# Altium PCB capacitivesensor.PcbDoc
Units mil, origin at the board's own origin, x right, y up, seen from the top; angles counter-clockwise.
Board outline 2362.2 x 952.76 mil, 2 copper layers (Top, Bottom); 50 components, 36 nets, 110 pads, 66 vias.
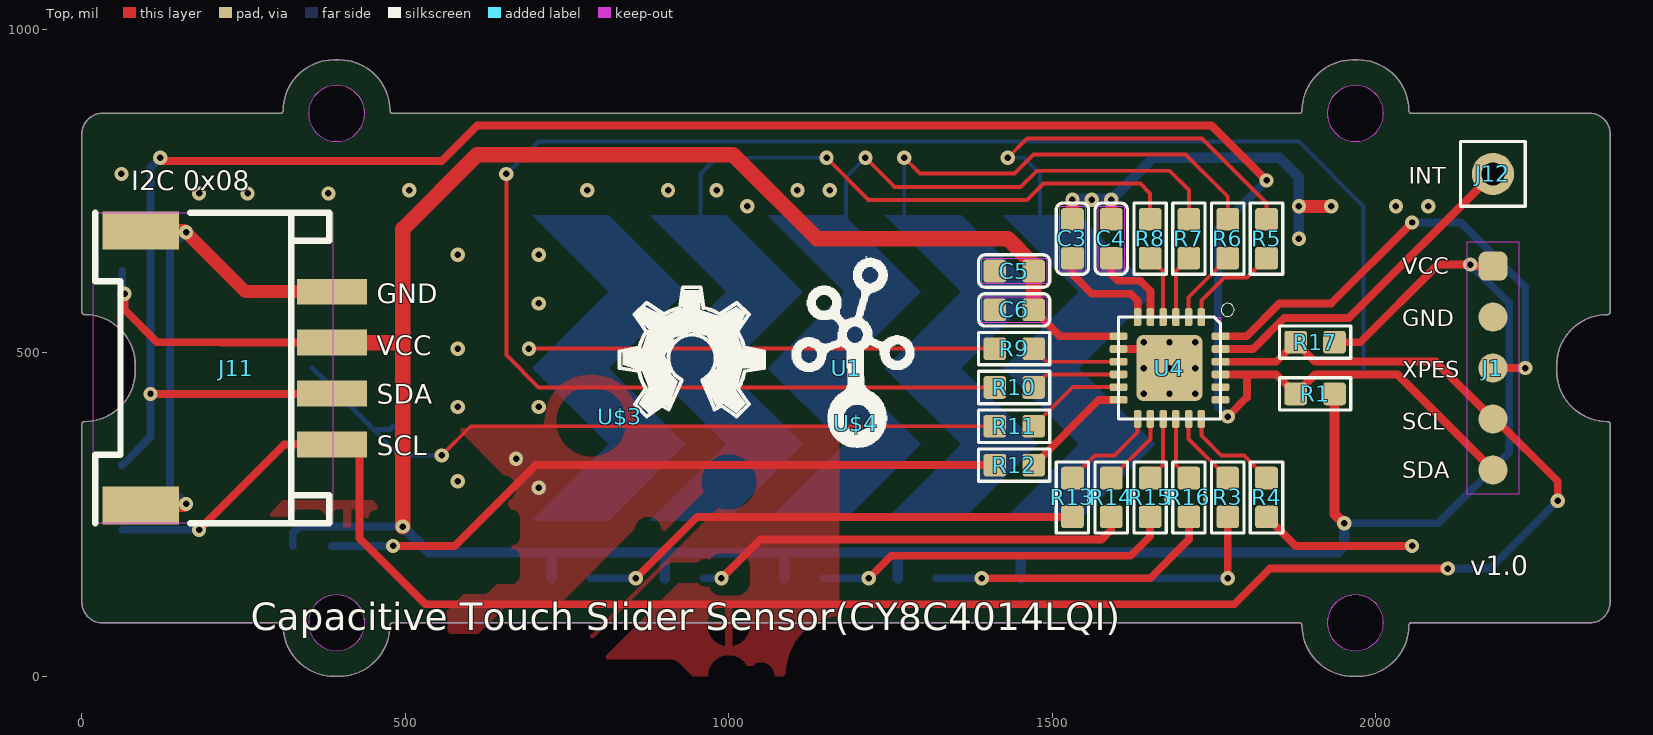
[diagram p0: Top view]
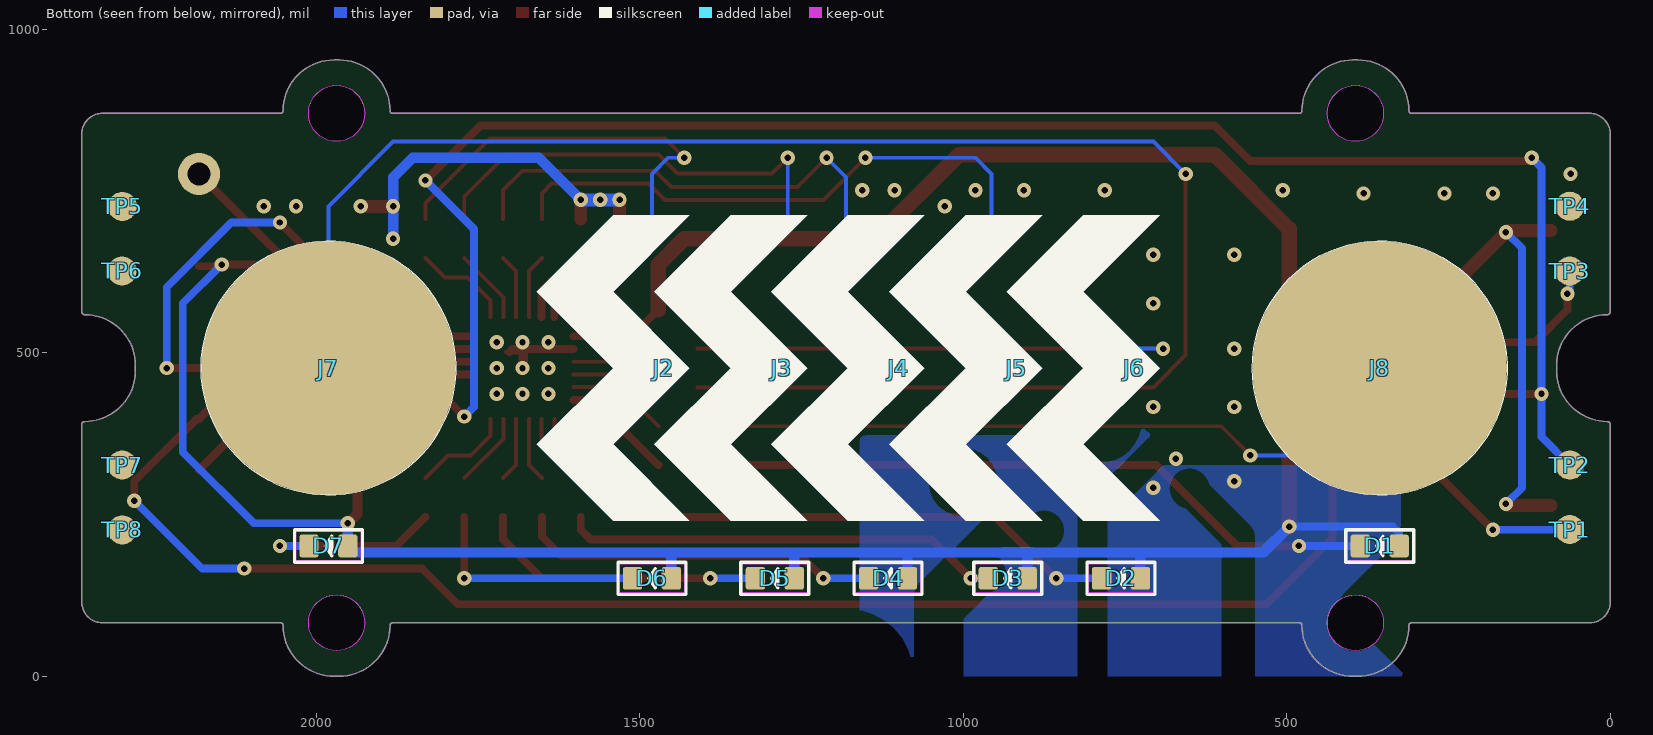
[diagram p1: Bottom view, seen from below]

## Layer stack, top to bottom
Top Solder: solder mask 0.4, Solder Resist, Dk 3.5
Top: signal copper 1.378
Dielectric 1: dielectric 12.6, FR-4, Dk 4.8
Bottom: signal copper 1.378
Bottom Solder: solder mask 0.4, Solder Resist, Dk 3.5

## Board outline
2362.2,562.99 cw(c2358.27,562.99) 2358.27,559.06 ccw(c2358.27,480.32) 2279.53,480.32 2279.53,472.44 ccw(c2358.27,472.44) 2358.27,393.7 cw(c2358.27,389.77) 2362.2,389.77 2362.2,114.18 cw(c2330.7,114.17) 2330.71,82.68 2055.12,82.68 ccw(c2055.12,78.74) 2051.18,78.74 cw(c1972.44,78.74) 1972.44,0 1964.56,0 cw(c1964.56,78.74) 1885.82,78.74 ccw(c1881.88,78.75) 1881.89,82.68 1267.71,82.68 480.31,82.68 ccw(c480.31,78.75) 476.38,78.74 cw(c397.64,78.74) 397.64,0 389.76,0 cw(c389.76,78.74) 311.02,78.74 ccw(c307.08,78.74) 307.08,82.68 31.49,82.68 cw(c31.5,114.17) 0,114.18 0,389.77 cw(c3.93,389.77) 3.93,393.7 ccw(c3.93,472.44) 82.67,472.44 82.67,480.32 ccw(c3.93,480.32) 3.93,559.06 cw(c3.93,562.99) 0,562.99 0,838.58 cw(c31.5,838.59) 31.49,870.08 307.08,870.08 ccw(c307.08,874.02) 311.02,874.02 cw(c389.76,874.02) 389.76,952.76 397.64,952.76 cw(c397.64,874.02) 476.38,874.02 ccw(c480.31,874.01) 480.31,870.08 1271.1,870.08 1881.89,870.08 ccw(c1881.88,874.01) 1885.82,874.02 cw(c1964.56,874.02) 1964.56,952.76 1972.44,952.76 cw(c1972.44,874.02) 2051.18,874.02 ccw(c2055.12,874.02) 2055.12,870.08 2330.71,870.08 cw(c2330.7,838.59) 2362.2,838.58
cut-out: 393.7,39.38 ccw(c393.7,82.68) 437,82.68 ccw(c393.7,82.68) 393.7,125.98 ccw(c393.7,82.68) 350.39,82.68 ccw(c393.7,82.68)
cut-out: 393.7,826.77 ccw(c393.7,870.08) 437,870.08 ccw(c393.7,870.08) 393.7,913.38 ccw(c393.7,870.08) 350.39,870.08 ccw(c393.7,870.08)
cut-out: 1968.5,826.77 ccw(c1968.5,870.08) 2011.81,870.08 ccw(c1968.5,870.08) 1968.5,913.38 ccw(c1968.5,870.08) 1925.19,870.08 ccw(c1968.5,870.08)
cut-out: 1968.5,39.38 ccw(c1968.5,82.68) 2011.81,82.68 ccw(c1968.5,82.68) 1968.5,125.98 ccw(c1968.5,82.68) 1925.19,82.68 ccw(c1968.5,82.68)

## Design rules (kind name [scope] priority, off if disabled: settings)
BoardOutlineClearance mdCopperDimension [All] p1: gap=10 ignorepadtopadclearanceinfootprint=FALSE except(0: Arc-SplitContinuation Track-SplitContinuation SMDPad-SplitContinuation THPad-SplitContinuation Via-SplitContinuation Fill-SplitContinuation Poly-SplitContinuation Region-SplitContinuation Text-SplitContinuation)
Clearance Clearance_for_PolygonClass_Isolate_20 [InPolygonClass('Isolate_20') vs IsArc Or IsTrack Or IsPad Or IsVia Or IsFill Or IsRegion Or IsText] p1: gap=20 ignorepadtopadclearanceinfootprint=FALSE
Clearance Clearance_for_PolygonClass_Isolate_10 [InPolygonClass('Isolate_10') vs IsArc Or IsTrack Or IsPad Or IsVia Or IsFill Or IsRegion Or IsText] p2: gap=10 ignorepadtopadclearanceinfootprint=FALSE
Clearance "Clearance (Same Net)" [All] p3: gap=6 ignorepadtopadclearanceinfootprint=FALSE
Clearance Clearance_for_NetClass_power [InNetClass('power') vs InNetClass('power')] p4: gap=20 ignorepadtopadclearanceinfootprint=FALSE
Clearance [All] p5: gap=6 ignorepadtopadclearanceinfootprint=FALSE
HoleSize HoleSize_For_NetClass_power [InNetClass('power')] p1: absolutevalues=TRUE maxlimit=20 minlimit=20 maxpercent=80.000 minpercent=20.000
HoleSize [All] p2: absolutevalues=TRUE maxlimit=100000 minlimit=10 maxpercent=80.000 minpercent=20.000
HoleToHoleClearance mdDrill [All] p1: gap=10 allowstackedmicrovias=TRUE
MinimumSolderMaskSliver [All] p1 off: minsoldermaskwidth=10
PasteMaskExpansion Expansion_SMDPaste_OFF [InPadClass('SMDPaste_OFF')] p1: expansion=0
PasteMaskExpansion mlMinCreamFrame [All] p2: expansion=0
PolygonConnect PolygonConnect_For_PolygonThermal_ON_Width120000_Gap100000 [InPolygonClass('PolygonThermal_ON_Width120000_Gap100000') vs Not IsVia] p1: connectstyle=Relief reliefconductorwidth=12 reliefentries=4 polygonreliefangle="90 Angle" airgapwidth=10
PolygonConnect ThermalVias [IsVia] p2: connectstyle=Direct reliefconductorwidth=10 reliefentries=4 polygonreliefangle="90 Angle" airgapwidth=10
PolygonConnect [All] p3: connectstyle=Relief reliefconductorwidth=10 reliefentries=4 polygonreliefangle="90 Angle" airgapwidth=10
RoutingVias [All] p1: holewidth=10 width=22 viastyle="Through Hole" minholewidth=10 minwidth=22 maxholewidth=100 maxwidth=100
SolderMaskExpansion Expansion_SMDSolder_OFF [InPadClass('SMDSolder_OFF')] p1: expansion=0 istentingtop=FALSE
SolderMaskExpansion mlMinStopFrame [All] p2: expansion=2 istentingtop=FALSE
Width Width_For_NetClass_power [InNetClass('power')] p1: maxlimit=40 minlimit=10 preferedwidth=20
Width [All] p2: maxlimit=10000 minlimit=1 preferedwidth=1
26 further rules are at their usual default settings.

## Classes and differential pairs
polygon class PolygonThermal_ON_Width120000_Gap100000: Polygon_1_Net_GND Polygon_2_Net_GND
polygon class Isolate_20: Polygon_2_Net_GND
polygon class Isolate_10: Polygon_1_Net_GND
pad class SMDSolder_OFF: J2-1 J3-1 J4-1 J5-1 J6-1 J7-1 J8-1
pad class SMDPaste_OFF: J1-1 J1-2 J1-3 J1-4 J1-5 J2-1 J3-1 J4-1 J5-1 J6-1 J7-1 J8-1 TP1-T TP2-T TP3-T TP4-T TP5-T TP6-T TP7-T TP8-T

## Components (designator, comment, footprint, x,y, rotation, side; value= is the part's Value field where it differs from the comment)
C3 "100nF" C0603 1531.1,676.38 r0 top
C4 "2.2nF" C0603 1591.1,676.38 r0 top
C5 "10uF" C0603 1441.1,626.38 r270 top
C6 "100nF" C0603 1441.1,566.38 r270 top
D1 "Green" LED-0603 356.1,201.38 r180 bottom
D2 "Green" LED-0603 756.1,151.38 r180 bottom
D3 "Green" LED-0603 931.1,151.38 r180 bottom
D4 "Green" LED-0603 1116.1,151.38 r180 bottom
D5 "Green" LED-0603 1291.1,151.38 r180 bottom
D6 "Green" LED-0603 1481.1,151.38 r180 bottom
D7 "Green" LED-0603 1981.1,201.38 r180 bottom
FR1 "" SEEEDSTUDIO-PCB-FRAME -1573.9,-1518.62 r0 top
J1 "DNP" H5-SMD-2.0-TEST 2181.1,476.38 r0 top
J2 "" PAD-SLIDE-1P 1423.1,476.38 r0 bottom
J3 "" PAD-SLIDE-1P 1241.2,476.38 r0 bottom
J4 "" PAD-SLIDE-1P 1060.07,476.38 r0 bottom
J5 "" PAD-SLIDE-1P 877.85,476.38 r0 bottom
J6 "" PAD-SLIDE-1P 696.1,476.38 r0 bottom
J7 "" PAD-SWITCH-1P 1981.1,476.38 r180 bottom
J8 "" PAD-SWITCH-1P 356.1,476.38 r180 bottom
J11 "Grove" HW4-SMD-2.0-90D 382.55,476.38 r90 top
J12 "DNP" 1P-65/35MIL 2181.1,776.38 r0 top
R1 "4.7k" R0603 1906.1,436.38 r90 top
R3 "560R" R0603 1771.1,276.38 r180 top
R4 "560R" R0603 1831.1,276.38 r180 top
R5 "560R" R0603 1831.1,676.38 r0 top
R6 "560R" R0603 1771.1,676.38 r0 top
R7 "560R" R0603 1711.1,676.38 r0 top
R8 "560R" R0603 1651.1,676.38 r0 top
R9 "560R" R0603 1441.1,506.38 r90 top
R10 "560R" R0603 1441.1,446.38 r90 top
R11 "560R" R0603 1441.1,386.38 r90 top
R12 "560R" R0603 1441.1,326.38 r90 top
R13 "560R" R0603 1531.1,276.38 r180 top
R14 "560R" R0603 1591.1,276.38 r180 top
R15 "560R" R0603 1651.1,276.38 r180 top
R16 "560R" R0603 1711.1,276.38 r180 top
R17 "4.7k" R0603 1906.1,516.38 r90 top
TP1 "" TP-D45MIL 62.44,226.77 r0 bottom
TP2 "" TP-D45MIL 62.17,326.33 r0 bottom
TP3 "" TP-D45MIL 62.37,626.28 r0 bottom
TP4 "" TP-D45MIL 62.29,726.54 r0 bottom
TP5 "" TP-D45MIL 2299.63,726.31 r180 bottom
TP6 "" TP-D45MIL 2299.98,626.49 r180 bottom
TP7 "" TP-D45MIL 2299.84,326.39 r180 bottom
TP8 "" TP-D45MIL 2299.67,226.29 r180 bottom
U1 "" GROVE-1*3-DRILL-DIM 1181.1,476.38 r0 top
U4 "CY8C4014LQI-422" QFN24G-0.5-4X4MM 1681.1,476.38 r270 top
U$3 "" OSHW_FILLX200_NOTEXT 831.1,401.38 r0 top
U$4 "" TWIGLOGO 1196.1,391.38 r0 top

## Footprints (in the part's own frame and the unit in brackets; to place one, negate y for a bottom-side part, rotate by r counter-clockwise, add the part's x,y. Pads: shape width x height; smd on the part's side, far side on the other; paste and mask are expansions set on the pad)
1P-65/35MIL [mil] "1P-65/35MIL"
  round 65 / inner round 60 / far side round 65 hole 35: 1(0,0)
  Top keep-out region: -50,-50 -50,50 50,50 50,-50
  silkscreen extent -50,-50 50,50
C0603 [mil] "C0603"
  rrect25% 35x35 smd: 1(0,30) 2(0,-30)
  Top keep-out region: -20,50 20,50 20,-50 -20,-50
  silkscreen extent -25,-55 25,55
GROVE-1*3-DRILL-DIM [mil] "GROVE-1*3-DRILL-DIM"
H5-SMD-2.0-TEST [mil] "H5-SMD-2.0-TEST"
  rrect50% 45x45 smd paste-22.5: 1(0,157.48)
  rrect100% 45x45 smd paste-22.5: 2(0,78.74) 3(0,0) 4(0,-78.74) 5(0,-157.48)
  Top keep-out region: -40,-195 -40,195 40,195 40,-195
HW4-SMD-2.0-90D [mm] "HW4-SMD-2.0-90D"
  rect 1.01x2.74 smd: 1(-3,-0.1) 2(-1,-0.1) 3(1,-0.1) 4(3,-0.1)
  rect 1.5x3 smd: SS1(-5.4,7.4) SS2(5.4,7.4)
  Top keep-out region: -6.096,-0.127 -6.096,9.271 6.096,9.271 6.096,-0.127
  silkscreen extent -6.1,0 6.1,9.2
LED-0603 [mil] "LED-0603"
  rrect25% 30x35 smd: +(30,0) -(-30,0)
  Top keep-out region: 50,22.5 50,-22.5 -50,-22.5 -50,22.5
  silkscreen extent -52,-25 52,25
OSHW_FILLX200_NOTEXT [mil] "OSHW_FILLX200_NOTEXT"
  silkscreen extent 0,0 223,200
PAD-SLIDE-1P [mm] "PAD-SLIDE-1P"
  rect 1.27x0.635 smd paste-0.635 mask-0.635: 1(1,0)
  Top region: 0,6 3,6 6,3 3,0 6,-3 3,-6 0,-6 3,-3 0,0 3,3 0,6
  silkscreen extent 0,-6 6,6
PAD-SWITCH-1P [mil] "PAD-SWITCH-1P"
  rrect100% 393.7x393.7 smd paste-196.85 mask-196.85: 1(0,0)
  silkscreen extent -197,-197 197,197
QFN24G-0.5-4X4MM [mm] "QFN24G-0.5-4X4MM"
  rrect50% 0.7x0.3 smd: 1(-2,1.25) 2(-2,0.75) 3(-2,0.25) 4(-2,-0.25) 5(-2,-0.75) 6(-2,-1.25) 13(2,-1.25) 14(2,-0.75) 15(2,-0.25) 16(2,0.25) 17(2,0.75) 18(2,1.25)
  rrect50% 0.3x0.7 smd: 7(-1.25,-2) 8(-0.75,-2) 9(-0.25,-2) 10(0.25,-2) 11(0.75,-2) 12(1.25,-2) 19(1.25,2) 20(0.75,2) 21(0.25,2) 22(-0.25,2) 23(-0.75,2) 24(-1.25,2)
  rrect25% 2.6x2.6 smd: PAD(0,0)
  Top keep-out region: -2,-2 -2,2 2,2 2,-2
  silkscreen extent -2.54,-2 2,2.54
R0603 [mil] "R0603"
  rrect25% 35x35 smd: 1(0,30) 2(0,-30)
  silkscreen extent -25,-55 25,55
SEEEDSTUDIO-PCB-FRAME [mil] "SEEEDSTUDIO-PCB-FRAME"
TP-D45MIL [mil] "TP-D45MIL"
  rrect100% 45x45 smd paste-22.5: T(0,0)
TWIGLOGO [mil] "TWIGLOGO"
  silkscreen extent -98,-38 90,257

## Part data
C3 C4 C5 C6: library part C0603, PackageName=C0603, OriginalSource=Eagle
D1 D2 D3 D4 D5 D6 D7: library part LED-0603, PackageName=LED-0603, OriginalSource=Eagle
FR1: library part SEEEDSTUDIO-PCB-FRAME, PackageName=SEEEDSTUDIO-PCB-FRAME, OriginalSource=Eagle
J1: library part H5-SMD-2.0-TEST, PackageName=H5-SMD-2.0-TEST, OriginalSource=Eagle
J2 J3 J4 J5 J6: library part PAD-SLIDE-1P, PackageName=PAD-SLIDE-1P, OriginalSource=Eagle
J7 J8: library part PAD-SWITCH-1P, PackageName=PAD-SWITCH-1P, OriginalSource=Eagle
J11: library part HW4-SMD-2.0-90D, PackageName=HW4-SMD-2.0-90D, OriginalSource=Eagle
J12: library part 1P-65/35MIL, PackageName=1P-65/35MIL, OriginalSource=Eagle
R1 R3 R4 R5 R6 R7 R8 R9 R10 R11 R12 R13 R14 R15 R16 R17: library part R0603, PackageName=R0603, OriginalSource=Eagle
TP1 TP2 TP3 TP4 TP5 TP6 TP7 TP8: library part TP-D45MIL, PackageName=TP-D45MIL, OriginalSource=Eagle
U1: library part GROVE-1*3-DRILL-DIM, PackageName=GROVE-1*3-DRILL-DIM, OriginalSource=Eagle
U4: library part QFN24G-0.5-4X4MM, PackageName=QFN24G-0.5-4X4MM, OriginalSource=Eagle
U$3: library part OSHW_FILLX200_NOTEXT, PackageName=OSHW_FILLX200_NOTEXT, OriginalSource=Eagle
U$4: library part TWIGLOGO, PackageName=TWIGLOGO, OriginalSource=Eagle

## Free pads (board coordinates)
  round 86.61 hole 86.61 unplated: MH1(1968.5,870.08) MH2(1968.5,82.68) MH3(393.7,82.68) MH4(393.7,870.08)

## Via types
v1: diameter 22/22 (per signal layer), hole 10, Top to Bottom, tented both sides, 66 vias

## Nets (pads, with @x,y where several pads share a name; then routed paths per layer and width w, separated by ;. In a path a pad name is that pad's centre, name@x,y a point inside that pad or via, vN(x,y) a via of type N, cw(c..) or ccw(c..) an arc to the next point about the centre after c; other vN are vias at no path point)
GND: C3.1 C4.1 C5.2 C6.2 J1.2 J11.4 J11.SS1 J11.SS2 TP4.T U4.8 U4.PAD | length 1616.1
  Top w8: U4.PAD@1676.57,480.91 U4.PAD@1676.57,505.91 ; U4.PAD@1681.1,501.38 1701.1,501.38 U4.PAD@1706.1,501.38
  Top w12: U4.8 1676.57,505.91 1696.57,505.91 U4.PAD@1701.1,501.38 ; v1(1681.1,476.38) U4.PAD@1681.1,501.38
  Top w20: J11.SS1 158.5,263.78 v1(161.1,266.38) ; J11.SS2 158.5,688.98 v1(161.1,686.38) 252.99,594.49 J11.4 ; C3.1 v1(1531.1,736.38) ; C4.1 v1(1591.1,736.38) ; v1(1881.1,726.38) v1(1931.1,726.38)
  Bottom w12: v1(161.1,266.38) 136.1,291.38 136.1,661.38 v1(161.1,686.38)
  Bottom w16: v1(1591.1,736.38) 1656.1,801.38 1851.1,801.38 1881.1,771.38 v1(1881.1,726.38) v1(1881.1,676.38)
  Bottom w20: v1(1531.1,736.38) v1(1561.1,736.38) v1(1591.1,736.38)
  other v1: 706.1,291.38 581.1,301.38 671.1,336.38 581.1,416.38 706.1,416.38 1641.1,436.38 1681.1,436.38 1721.1,436.38 1641.1,476.38 1721.1,476.38 581.1,506.38 1641.1,516.38 1681.1,516.38 1721.1,516.38 706.1,576.38 581.1,651.38 706.1,651.38 1028.6,726.38 2031.1,726.38 2081.1,726.38 181.1,746.38 256.1,746.38 381.1,746.38 506.1,751.38 781.1,751.38 906.1,751.38 981.1,751.38 1106.1,751.38 1156.1,751.38 61.1,776.38
INT: J12.1 U4.23 | length 533.3
  Top w12: U4.23 1810.63,505.91 1858.6,553.88 1958.6,553.88 J12.1
N$3: D5.- R16.1 | length 449.9
  Top w12: v1(1391.1,151.38) 1651.1,151.38 1711.1,211.38 R16.1
  Bottom w12: D5.- v1(1391.1,151.38)
N$4: D4.- R15.1 | length 561.9
  Top w12: v1(1216.1,151.38) 1251.1,186.38 1621.1,186.38 1651.1,216.38 R15.1
  Bottom w12: D4.- v1(1216.1,151.38)
N$5: D3.- R14.1 | length 681.1
  Top w12: v1(988.6,151.38) 1048.6,211.38 1576.1,211.38 1591.1,226.38 R14.1
  Bottom w12: D3.- v1(988.6,151.38)
N$6: D2.- R13.1 | length 784.4
  Top w12: v1(856.1,151.38) 951.1,246.38 R13.1
  Bottom w12: D2.- v1(856.1,151.38)
N$7: J6.1 R9.1 | length 836.8
  Top w6: v1(691.1,506.38) R9.1
  Bottom w6: v1(691.1,506.38) 765.47,506.38
  Bottom w8: J6.1 765.47,506.38
N$8: R16.2 U4.16 | length 99.6
  Top w6: U4.16 1690.94,326.54 R16.2
N$9: R15.2 U4.15 | length 99.6
  Top w6: R15.2 1671.26,326.54 U4.15
N$10: R14.2 U4.14 | length 116.3
  Top w6: R14.2 1651.57,366.85 U4.14
N$11: R13.2 U4.13 | length 150.6
  Top w6: R13.2 1566.1,341.38 1596.1,341.38 1631.89,377.17 U4.13
N$12: R5.2 U4.1 | length 153.5
  Top w6: U4.1 1730.31,580.59 1766.1,616.38 1801.1,616.38 R5.2
N$13: R6.2 U4.2 | length 116.3
  Top w6: U4.2 1710.63,585.91 R6.2
N$14: R7.2 U4.3 | length 99.6
  Top w6: U4.3 1690.94,626.22 R7.2
N$15: R8.2 U4.4 | length 99.6
  Top w6: R8.2 1671.26,626.22 U4.4
N$16: C4.2 U4.5 | length 136.8
  Top w12: C4.2 1591.1,621.38 1601.1,611.38 1636.1,611.38 1651.57,595.91 U4.5
N$17: J7.1 R10.1 | length 2692.8
  Top w6: v1(656.1,776.38) 656.1,496.38 706.1,446.38 R10.1
  Bottom w6: v1(656.1,776.38) 706.1,826.38 1881.1,826.38 1981.1,726.38 J7.1
N$18: R9.2 U4.9 | length 139.6
  Top w6: R9.2 1491.26,486.22 U4.9
N$19: R10.2 U4.10 | length 139.6
  Top w6: R10.2 1491.1,466.38 1602.2,466.38 U4.10
N$20: R11.2 U4.11 | length 156.3
  Top w6: R11.2 1531.57,446.85 U4.11
N$21: R12.2 U4.12 | length 173
  Top w12: R12.2 1571.89,427.17 U4.12
N$22: J8.1 R11.1 | length 1161.6
  Top w6: v1(556.1,341.38) 601.1,386.38 R11.1
  Bottom w6: J8.1@446.1,386.38 451.1,381.38 491.1,341.38 v1(556.1,341.38)
  Bottom w8: J8.1 J8.1@446.1,386.38 ; J8.1@451.1,381.38 476.1,381.38 J8.1@481.1,386.38
N$23: D1.- R12.1 | length 1076.8
  Top w12: v1(481.1,201.38) 576.1,201.38 701.1,326.38 R12.1
  Bottom w12: D1.- v1(481.1,201.38)
N$24: C3.2 U4.6 | length 168.2
  Top w12: C3.2 1531.1,621.38 1561.1,591.38 1621.1,591.38 1631.89,580.59 U4.6
N$25: J2.1 R5.1 | length 927.7
  Top w6: v1(1431.1,801.38) 1461.1,831.38 1731.1,831.38 1831.1,731.38 R5.1
  Bottom w6: v1(1431.1,801.38) 1456.1,801.38 1481.1,776.38 1481.1,696.38
  Bottom w8: J2.1 1572.47,586.38 1576.1,586.38 1491.1,671.38 1491.1,686.38 1481.1,696.38
N$26: J3.1 R6.1 | length 1030.1
  Top w6: v1(1271.1,801.38) 1295.58,776.9 1441.62,776.9 1471.1,806.38 1706.1,806.38 1771.1,741.38 R6.1
  Bottom w6: v1(1271.1,801.38) 1271.1,706.38 1276.1,701.38
  Bottom w8: 1271.1,701.38 1276.1,701.38 1286.1,701.38 1401.1,586.38 1390.57,586.38 J3.1
N$27: J4.1 R7.1 | length 987.8
  Top w6: v1(1211.1,801.38) 1248.69,763.79 ; 1248.69,763.97 1248.69,763.79 ; R7.1 1711.1,751.38 1681.1,781.38 1476.1,781.38 1451.1,756.38 1256.1,756.38 1248.69,763.79
  Bottom w6: 1181.1,666.38 1181.1,771.38 v1(1211.1,801.38)
  Bottom w8: 1181.1,666.38 1176.1,661.38 1176.1,621.38 1211.1,586.38 1209.44,586.38
  Bottom w12: J4.1 1209.44,586.38
N$28: J5.1 R8.1 | length 1182.9
  Top w6: v1(1151.1,801.38) 1216.1,736.38 1461.1,736.38 1486.1,761.38 1636.1,761.38 1651.1,746.38 R8.1
  Bottom w6: 956.1,661.38 956.1,776.38 981.1,801.38 v1(1151.1,801.38)
  Bottom w8: J5.1 1036.1,595.26 1036.1,601.38 981.1,656.38 961.1,656.38 956.1,661.38
N$29: D6.- R3.1 | length 355
  Top w12: v1(1771.1,151.38) R3.1
  Bottom w12: D6.- v1(1771.1,151.38)
N$32: R3.2 U4.17 | length 116.3
  Top w6: U4.17 1710.63,366.85 R3.2
N$33: R4.2 U4.18 | length 153.5
  Top w6: U4.18 1730.31,372.17 1761.1,341.38 1796.1,341.38 R4.2
N$34: D7.- R4.1 | length 288.6
  Top w12: R4.1 1876.1,201.38 v1(2056.1,201.38)
  Bottom w12: D7.- v1(2056.1,201.38)
SWDCLK_SCL: J1.4 J11.1 R17.1 TP1.T U4.22 | length 3179.7
  Top w12: v1(181.1,226.38) 312.99,358.27 J11.1 429.21,358.27 429.21,213.27 531.1,111.38 1781.1,111.38 1836.1,166.38 v1(2111.1,166.38) ; U4.22 1845.94,486.22 R17.1 1906.1,486.38 2092.36,486.38 J1.4 2184.84,397.64 2281.1,301.38 v1(2281.1,271.38)
  Bottom w12: TP1.T 62.83,226.38 v1(181.1,226.38) ; v1(2111.1,166.38) 2176.1,166.38 v1(2281.1,271.38)
SWDIO_SDA: J1.5 J11.2 R1.1 TP2.T U4.21 | length 3537.2
  Top w12: v1(106.1,436.38) 385.86,436.38 J11.2 ; v1(121.1,801.38) 126.1,796.38 556.1,796.38 611.1,851.38 1746.1,851.38 v1(1831.1,766.38) ; U4.21 1800.77,466.54 ; v1(1771.1,401.38) 1800.77,431.05 1800.77,466.54 ; J1.5 2033.62,466.38 1906.1,466.38 R1.1 1845.94,466.54 1800.77,466.54
  Bottom w12: TP2.T@62.23,326.38 TP2.T 106.1,370.25 v1(106.1,436.38) 106.1,786.38 v1(121.1,801.38) ; v1(1771.1,401.38) 1756.1,416.38 1756.1,691.38 v1(1831.1,766.38)
VCC: C5.1 C6.1 D1.+ D2.+ D3.+ D4.+ D5.+ D6.+ D7.+ J1.1 J11.3 R1.2 R17.2 TP3.T U4.7 | length 5347.5
  Top w12: v1(66.1,591.38) 66.1,566.38 116.1,516.38 255.47,516.38 256.1,515.75 ; 216.73,515.75 256.1,515.75 ; J11.3 256.1,515.75 ; C6.1 1511.89,525.59 U4.7 ; R17.2 1976.1,516.38 2096.1,636.38 v1(2146.1,636.38) 2148.62,633.86 J1.1
  Top w16: R1.2 1936.1,251.38 v1(1951.1,236.38)
  Top w24: J11.3 496.1,515.75 ; v1(496.1,231.38) 496.1,515.75 ; C6.1 C5.1 1471.1,636.38 1431.1,676.38 1136.1,676.38 1006.1,806.38 611.1,806.38 496.1,691.38 496.1,515.75
  Bottom w12: TP3.T 62.47,626.38 62.47,595.01 v1(66.1,591.38) ; D1.+ 326.1,221.38 336.1,231.38 v1(496.1,231.38) ; v1(1951.1,236.38) 2096.1,236.38 2206.1,346.38 2206.1,576.38 v1(2146.1,636.38)
  Bottom w16: v1(496.1,231.38) 536.1,191.38 726.1,191.38 ; D2.+ 726.1,191.38 ; D3.+ 901.1,191.38 ; D4.+ 1086.1,186.38 1081.1,191.38 ; D5.+ 1261.1,191.38 ; D6.+ 1451.1,191.38 ; v1(1951.1,236.38) D7.+ 1941.1,191.38 1451.1,191.38 ; 726.1,191.38 901.1,191.38 ; 901.1,191.38 1081.1,191.38 ; 1081.1,191.38 1261.1,191.38 ; 1261.1,191.38 1451.1,191.38
XPES: J1.3 U4.24 | length 760.5
  Top w12: U4.24 1800.31,525.59 1851.1,576.38 1931.1,576.38 v1(2056.1,701.38) ; J1.3 v1(2231.1,476.38)
  Bottom w12: v1(2056.1,701.38) 2131.1,701.38 2231.1,601.38 v1(2231.1,476.38)
pads on no net: TP5.T TP6.T TP7.T TP8.T U4.19 U4.20

## Polygon pours and split planes (outlines as drawn)
GND on Top "Polygon_1_Net_GND" (solid, remove dead copper, pour order 1): -49.9,-29.62 2387.1,-29.62 2387.1,982.38 -49.9,982.38 -49.9,-18.62
GND on Bottom "Polygon_2_Net_GND" (solid, remove dead copper, pour order 0): -49.9,-29.62 2387.1,-29.62 2387.1,982.38 -49.9,982.38 -49.9,-18.62

## Keep-outs
Keep-Out Layer:
  the board outline again, w1

## Silkscreen, mask and mechanical layers (free items; w line width, h text height)
Top Overlay:
  text "INT" at 2051.1,761.38 h25.5
  text "I2C 0x08" at 76.1,751.38 h29.75
  text "VCC" at 2041.1,621.38 h25.5
  text "GND" at 456.1,576.38 h29.75
  text "GND" at 2041.1,541.38 h25.5
  text "VCC" at 456.1,496.38 h29.75
  text "XPES" at 2041.1,461.38 h25.5
  text "SDA" at 456.1,421.38 h29.75
  text "SCL" at 2041.1,381.38 h25.5
  text "SCL" at 456.1,341.38 h29.75
  text "SDA" at 2041.1,306.38 h25.5
  text "v1.0" at 2146.1,156.38 h29.75
  text "Capacitive Touch Slider Sensor(CY8C4014LQI)" at 261.1,71.38 h42.5
Dimension:
  lines w1: 1267.71,82.68 1881.89,82.68 cw(c1881.88,78.75) 1885.82,78.74 ccw(c1964.56,78.74) 1964.56,0 1972.44,0 ccw(c1972.44,78.74) 2051.18,78.74 cw(c2055.12,78.74) 2055.12,82.68 2330.71,82.68 ; 1267.71,870.08 1881.89,870.08 ccw(c1881.88,874.01) 1885.82,874.02 cw(c1964.56,874.02) 1964.56,952.76 1972.44,952.76 cw(c1972.44,874.02) 2051.18,874.02 ccw(c2055.12,874.02) 2055.12,870.08 2330.71,870.08 ; 1271.1,870.08 480.31,870.08 cw(c480.31,874.01) 476.38,874.02 ccw(c397.64,874.02) 397.64,952.76 389.76,952.76 ccw(c389.76,874.02) 311.02,874.02 cw(c307.08,874.02) 307.08,870.08 31.49,870.08 ccw(c31.5,838.59) 0,838.58 0,562.99 ccw(c3.93,562.99) 3.93,559.06 cw(c3.93,480.32) 82.67,480.32 82.67,472.44 cw(c3.93,472.44) 3.93,393.7 ccw(c3.93,389.77) 0,389.77 0,114.18 ; 1286.1,82.68 480.31,82.68 ccw(c480.31,78.75) 476.38,78.74 cw(c397.64,78.74) 397.64,0 389.76,0 cw(c389.76,78.74) 311.02,78.74 ccw(c307.08,78.74) 307.08,82.68 31.49,82.68 ; 0,114.18 ccw(c31.5,114.17) 31.49,82.68 ; 0,114.18 ccw(c31.5,114.17) 31.49,82.68 ; 2279.53,472.44 ccw(c2358.27,472.44) 2358.27,393.7 ; 2279.53,472.44 ccw(c2358.27,472.44) 2358.27,393.7 ; 2279.53,472.44 2279.53,480.32 ; 2279.53,480.32 cw(c2358.27,480.32) 2358.27,559.06 ; 2279.53,480.32 cw(c2358.27,480.32) 2358.27,559.06 ; 2330.71,82.68 ccw(c2330.7,114.17) 2362.2,114.18 ; 2330.71,82.68 ccw(c2330.7,114.17) 2362.2,114.18 ; 2330.71,82.68 ccw(c2330.7,114.17) 2362.2,114.18 ; 2330.71,870.08 cw(c2330.7,838.59) 2362.2,838.58 ; 2330.71,870.08 cw(c2330.7,838.59) 2362.2,838.58 ; 2330.71,870.08 cw(c2330.7,838.59) 2362.2,838.58 ; 2358.27,393.7 cw(c2358.27,389.77) 2362.2,389.77 ; 2358.27,393.7 cw(c2358.27,389.77) 2362.2,389.77 ; 2358.27,559.06 ccw(c2358.27,562.99) 2362.2,562.99 ; 2358.27,559.06 ccw(c2358.27,562.99) 2362.2,562.99 ; 2362.2,114.18 2362.2,389.77 ; 2362.2,562.99 2362.2,838.58

## Text inside footprints (layer, text, board x,y; h text height)
FR1: Top "http://creativecommons.org/licenses/by-sa/4.0/" at -1573.9,-1518.62 h42.5; Top "To view a copy of this license,visit:" at -1573.9,-1443.62 h42.5; Top "This work is licensed under the Creative Commons Attribution 4.0 International License." at -1573.9,-1368.62 h42.5
U1: Reference "SIG/READ VOL/TX" at 2889.8,726.38 h29.75 r180; Reference "SIG/RX" at 2599.8,651.38 h29.75 r180; Reference "VCC" at 2499.8,351.38 h29.75 r180; Reference "GND" at 2499.8,251.38 h29.75 r180; Reference "4P-SMD-2.0-90D" at 1949.8,376.38 h29.75 r270; Reference "4P-2.0" at 2199.8,376.38 h29.75 r270; Reference "4P-SMD-2.0" at 2074.8,376.38 h29.75 r270; Reference "TP" at 2424.8,501.38 h29.75 r270; Reference "SIG/READ VOL/TX" at -527.6,226.38 h29.75; Reference "SIG/RX" at -237.6,301.38 h29.75; Reference "VCC" at -137.6,601.38 h29.75; Reference "GND" at -137.6,701.38 h29.75; Reference "4P-SMD-2.0-90D" at 412.4,576.38 h29.75 r90; Reference "4P-2.0" at 162.4,576.38 h29.75 r90; Reference "4P-SMD-2.0" at 287.4,576.38 h29.75 r90; Reference "TP" at -62.6,451.38 h29.75 r90